# EAGLE board bare_board_v2 (EAGLE 6.3)
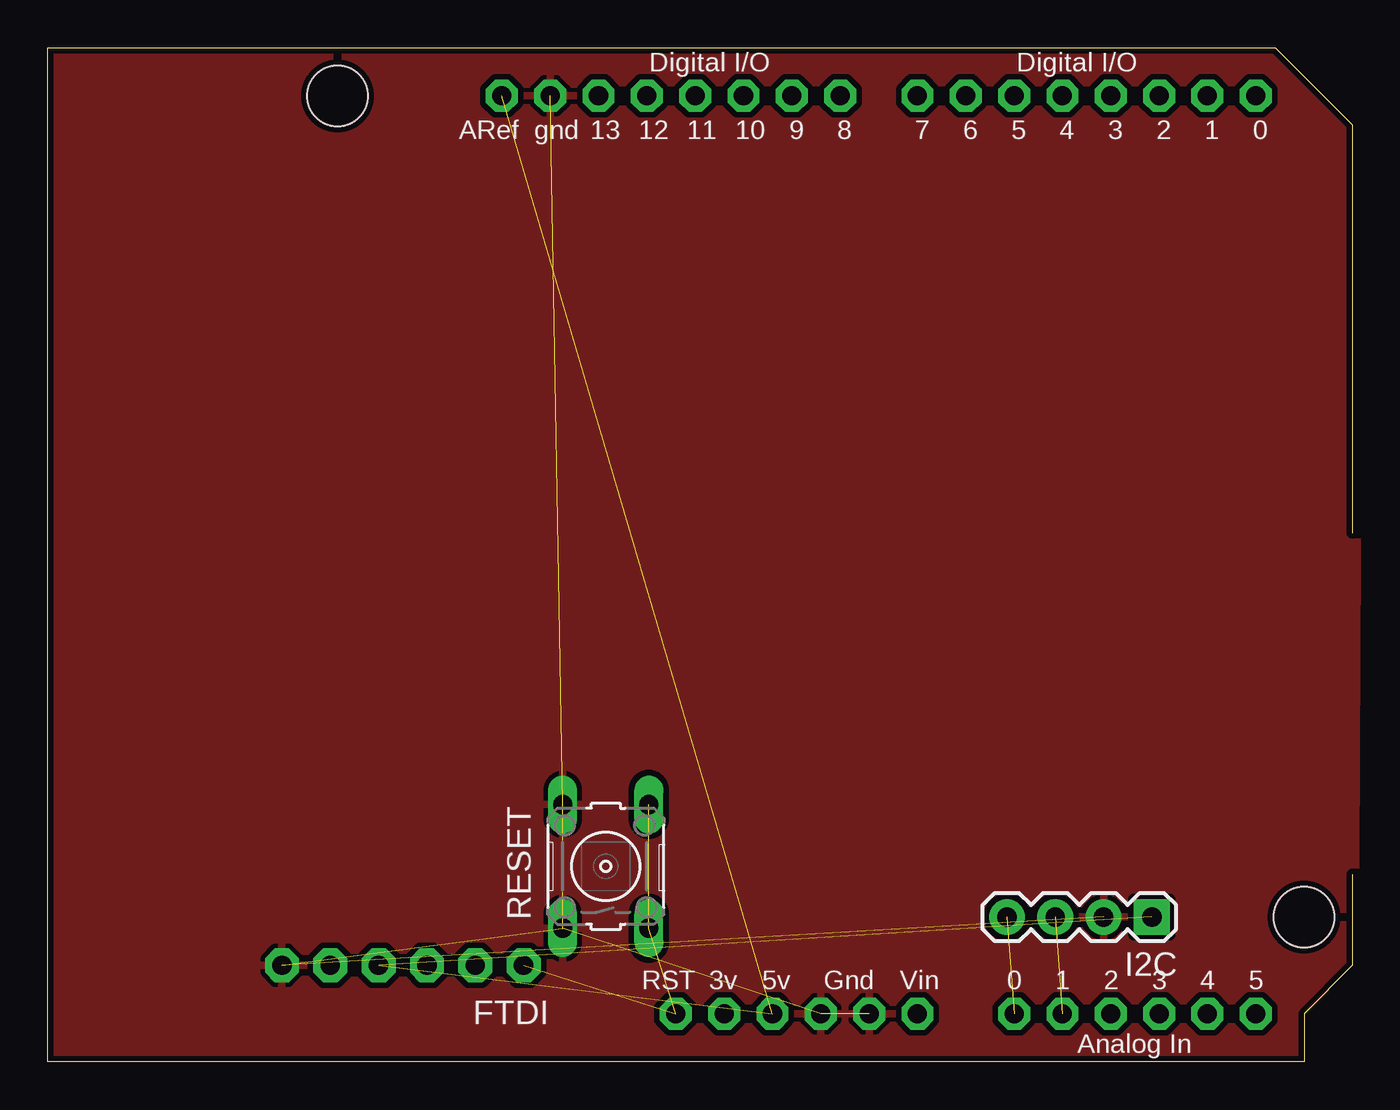
[diagram p0: board, top side]
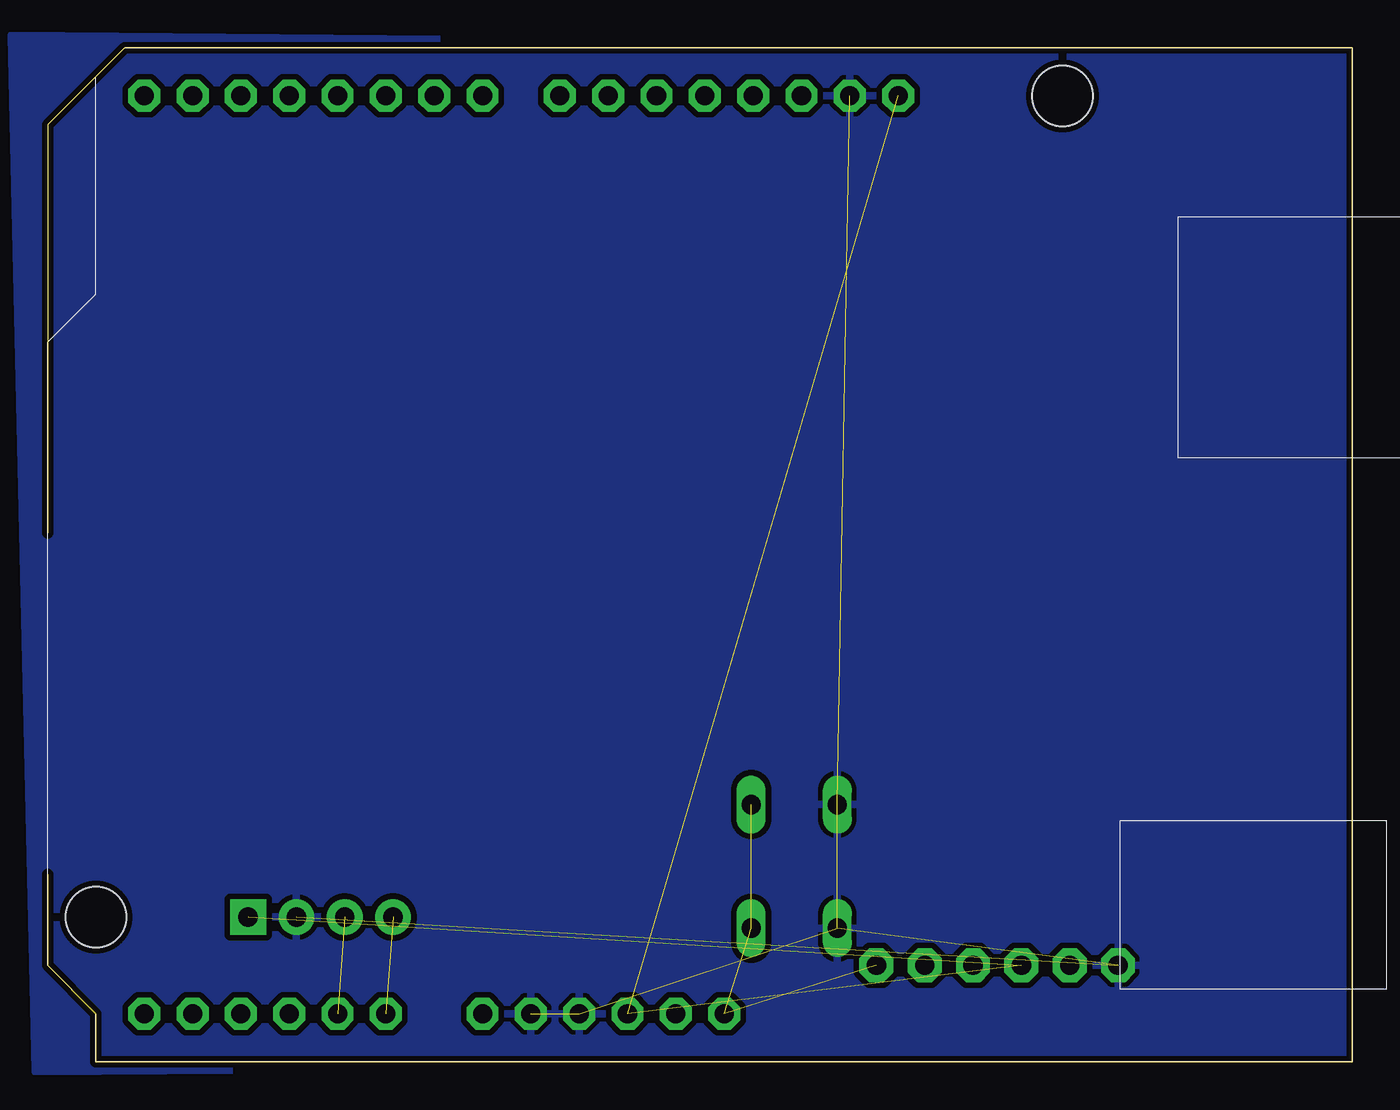
[diagram p1: board, bottom side, seen from below]

Size 68.58 x 53.34 mm. Coordinates in mm from the lower left corner, seen from the top.
Outline: 68.58,27.81 68.58,49.28 64.52,53.34 0,53.34 0,0 66.04,0 66.04,2.54 68.58,5.08 68.58,9.86
Copper layers (1*16): Top 0.035mm / dielectric 1.5mm / Bottom 0.035mm
Design rules "default *": minimum track width 12mil, minimum drill 19mil, track to track 12mil, track to pad 12mil, pad to pad 12mil, via to via 12mil, smd to smd 0mil, copper to edge 12mil, drill to drill 8mil, minimum pad ring 10mil, minimum via ring 8mil, stop-mask expansion 4mil, vias tented up to drill 20mil, thermal gap 10mil
Net classes: 1 power: width 0.61 mm
Holes 3.2 mm at 66.04,7.62 15.24,50.8

## Footprints (pad centres in the part's own frame; a part is rotated, then mirrored left to right if it is on the bottom)
1X06-CLEANBIG = drill 1.016 pad 1.778 octagon: 1 -6.35,0; 2 -3.81,0; 3 -1.27,0; 4 1.27,0; 5 3.81,0; 6 6.35,0
1X04 = drill 1.016 pad 1.88 square: 1 0,0 | drill 1.016 pad 1.88: 2 2.54,0; 3 5.08,0; 4 7.62,0
B3F-10XX = drill 1.016 long: 1 -3.251,2.261; 2 3.251,2.261; 3 -3.251,-2.261; 4 3.251,-2.261
ARDUINO-NOHOLE = drill 1 pad 1.676 octagon: 3V 35.56,2.54; 5V 38.1,2.54; A0 50.8,2.54; A1 53.34,2.54; A2 55.88,2.54; A3 58.42,2.54; A4 60.96,2.54; A5 63.5,2.54; AREF 23.876,50.8; D0 63.5,50.8; D1 60.96,50.8; D2 58.42,50.8; D3 55.88,50.8; D4 53.34,50.8; D5 50.8,50.8; D6 48.26,50.8; D7 45.72,50.8; D8 41.656,50.8; D9 39.116,50.8; D10 36.576,50.8; D11 34.036,50.8; D12 31.496,50.8; D13 28.956,50.8; GND 26.416,50.8; GND1 43.18,2.54; GND2 40.64,2.54; RESET 33.02,2.54; VIN 45.72,2.54

## Placement (x,y rotation side)
E$1  [OSHWLOGO_TOL_0.2]  74.98,11.66 0 top  (outside the outline)
FTDI  FTDI  [1X06-CLEANBIG]  18.67,5.08 180 top
I2C  [1X04]  58.04,7.62 180 top
RESET  [B3F-10XX]  29.34,10.29 90 top
U$1  ARDUINO-NOHOLE  [ARDUINO-NOHOLE]  0,0 0 top

## Library data of the parts
E$1 U$1 = adafruit
FTDI = carduino
I2C = SparkFun
RESET = switch-omron

## Nets
GND [power]: FTDI.6 I2C.2 RESET.1 RESET.2 U$1.GND U$1.GND1 U$1.GND2
N$2: U$1.A4
N$4: U$1.A5
N$17: U$1.3V
RESET: FTDI.1 RESET.3 RESET.4 U$1.RESET
RX: FTDI.3
SCL: I2C.4 U$1.A0
SDA: I2C.3 U$1.A1
TX: FTDI.2
VCC: FTDI.4 I2C.1 U$1.5V U$1.AREF
VIN: U$1.VIN

## Tracks (layer width: path | path; a pad name or v marks a point on that pad's centre or on a via)
GND  (6 unrouted)
  pour Bottom: 0,53.34 70.48,53.98 69.22,-0.51 0,0
  pour Top: 0,53.34 68.96,53.09 68.71,0.25 -2.54,-3.56
RESET  (3 unrouted)
SCL  (1 unrouted)
SDA  (1 unrouted)
VCC  (3 unrouted)